# EAGLE board project-arduino (EAGLE 9.7.0)

Size 220.89 x 82.4 mm. Coordinates in mm from the lower left corner, seen from the top.
Outline: 0,0 220.88,0 220.88,82.4 0,82.4 0,0
Copper layers (1*16): Top 0.035mm / dielectric 1.5mm / Bottom 0.035mm
Design rules "default": minimum track width 6mil, minimum drill 0.35mm, track to track 6mil, track to pad 6mil, pad to pad 6mil, via to via 6mil, smd to smd 6mil, copper to edge 40mil, drill to drill 6mil, minimum pad ring 10mil, minimum via ring 8mil, stop-mask expansion 4mil, vias tented up to drill 0mil, thermal gap 10mil

## Footprints (pad centres in the part's own frame; a part is rotated, then mirrored left to right if it is on the bottom)
LEDRD254W60D565H860B = drill 0.981 pad 1.581: 1 -1.27,0; 2 1.27,0
LEDRD254W60D565H860B_Y = drill 0.981 pad 1.581: 1 -1.27,0; 2 1.27,0
LEDRD254W60D565H860B_G = drill 0.981 pad 1.581: 1 -1.27,0; 2 1.27,0
RESAD1016W63L850D250B = drill 0.83 pad 1.43: 1 -5.08,0; 2 5.08,0
ARDUINO-UNO-R3-SHIELD = drill 1.016 pad 1.88: 3.3V 24.13,-2.54; 5V 24.13,0; A0 24.13,12.7; A1 24.13,15.24; A2 24.13,17.78; A3 24.13,20.32; A4 24.13,22.86; A5 24.13,25.4; AREF -24.13,-13.97; D2 -24.13,20.32; D3 -24.13,17.78; D4 -24.13,15.24; D5 -24.13,12.7; D6 -24.13,10.16; D7 -24.13,7.62; D8 -24.13,3.81; D9 -24.13,1.27; D10 -24.13,-1.27; D11 -24.13,-3.81; D12 -24.13,-6.35; D13 -24.13,-8.89; GND@0 24.13,2.54; GND@1 24.13,5.08; GND@2 -24.13,-11.43; IOREF 24.13,-7.62; NC 24.13,-10.16; RES 24.13,-5.08; RX -24.13,25.4; SCL -24.13,-19.05; SDA -24.13,-16.51; TX -24.13,22.86; VIN 24.13,7.62

## Placement (x,y rotation side)
D1  RED  [LEDRD254W60D565H860B]  79.84,57.9 180 top
D2  YELLOW  [LEDRD254W60D565H860B_Y]  92.54,57.9 180 top
D3  GREEN  [LEDRD254W60D565H860B_G]  105.24,57.9 180 top
D4  RED  [LEDRD254W60D565H860B]  41.74,57.9 180 top
D5  YELLOW  [LEDRD254W60D565H860B_Y]  51.9,57.9 180 top
D6  GREEN  [LEDRD254W60D565H860B_G]  62.06,57.9 180 top
D7  RED  [LEDRD254W60D565H860B]  62.06,29.96 0 top
D8  YELLOW  [LEDRD254W60D565H860B_Y]  51.9,29.96 0 top
D9  GREEN  [LEDRD254W60D565H860B_G]  41.74,29.96 0 top
D10  RED  [LEDRD254W60D565H860B]  29.04,29.96 0 top
D11  YELLOW  [LEDRD254W60D565H860B_Y]  18.88,29.96 0 top
D12  GREEN  [LEDRD254W60D565H860B_G]  8.72,29.96 0 top
R1  220  [RESAD1016W63L850D250B]  84.83,52.05 90 top
R2  220  [RESAD1016W63L850D250B]  97.63,52.26 90 top
R3  220  [RESAD1016W63L850D250B]  110.24,52.09 90 top
R4  220  [RESAD1016W63L850D250B]  44.2,52.59 90 top
R5  220  [RESAD1016W63L850D250B]  54.51,52.84 90 top
R6  220  [RESAD1016W63L850D250B]  66.86,51.95 90 top
R7  220  [RESAD1016W63L850D250B]  39.16,35.32 90 top
R8  220  [RESAD1016W63L850D250B]  49.3,34.94 90 top
R9  220  [RESAD1016W63L850D250B]  59.47,34.83 90 top
R10  220  [RESAD1016W63L850D250B]  26.4,35.19 90 top
R11  220  [RESAD1016W63L850D250B]  16.26,35.09 90 top
R12  220  [RESAD1016W63L850D250B]  6.33,34.96 90 top
U1  ARDUINO-UNO-R3-SHIELD  [ARDUINO-UNO-R3-SHIELD]  191.04,47.88 0 top

## Library data of the parts
D1 D4 D7 D10 = Tinkercad; CATEGORY: Opto-Electronic; SUB-CATEGORY: LED; VALUE: LED_RED
D2 D5 D8 D11 = Tinkercad; CATEGORY: Opto-Electronic; SUB-CATEGORY: LED; VALUE: LED_YELLOW
D3 D6 D9 D12 = Tinkercad; CATEGORY: Opto-Electronic; SUB-CATEGORY: LED; VALUE: LED_GREEN
R1-R12 U1 = Tinkercad

## Nets
D1_A: D1.1 R1.2
D2_A: D2.1 R2.2
D3_A: D3.1 R3.2
D4_A: D4.1 R4.2
D5_A: D5.1 R5.2
D6_A: D6.1 R6.2
D7_A: D7.1 R9.1
D8_A: D8.1 R8.1
D9_A: D9.1 R7.1
D10_A: D10.1 R10.1
D11_A: D11.1 R11.1
D12_A: D12.1 R12.1
U1_D2: R4.1 U1.D2
U1_D3: R5.1 U1.D3
U1_D4: R6.1 U1.D4
U1_D5: R1.1 U1.D5
U1_D6: R2.1 U1.D6
U1_D7: R3.1 U1.D7
U1_D8: R9.2 U1.D8
U1_D9: R8.2 U1.D9
U1_D10: R7.2 U1.D10
U1_D11: R10.2 U1.D11
U1_D12: R11.2 U1.D12
U1_D13: R12.2 U1.D13
U1_GND: D1.2 D2.2 D3.2 D4.2 D5.2 D6.2 D7.2 D8.2 D9.2 D10.2 D11.2 D12.2 U1.GND@0 U1.GND@1 U1.GND@2

## Tracks (layer width: path | path; a pad name or v marks a point on that pad's centre or on a via)
D1_A  (1 unrouted)
D2_A  (1 unrouted)
D3_A  (1 unrouted)
D4_A  (1 unrouted)
D5_A  (1 unrouted)
D6_A  (1 unrouted)
D7_A  (1 unrouted)
D8_A  (1 unrouted)
D9_A  (1 unrouted)
D10_A  (1 unrouted)
D11_A  (1 unrouted)
D12_A  (1 unrouted)
U1_D2  (1 unrouted)
U1_D3  (1 unrouted)
U1_D4  (1 unrouted)
U1_D5  (1 unrouted)
U1_D6  (1 unrouted)
U1_D7  (1 unrouted)
U1_D8  (1 unrouted)
U1_D9  (1 unrouted)
U1_D10  (1 unrouted)
U1_D11  (1 unrouted)
U1_D12  (1 unrouted)
U1_D13  (1 unrouted)
U1_GND  (14 unrouted)